# EAGLE board sensor (EAGLE 9.6.2)
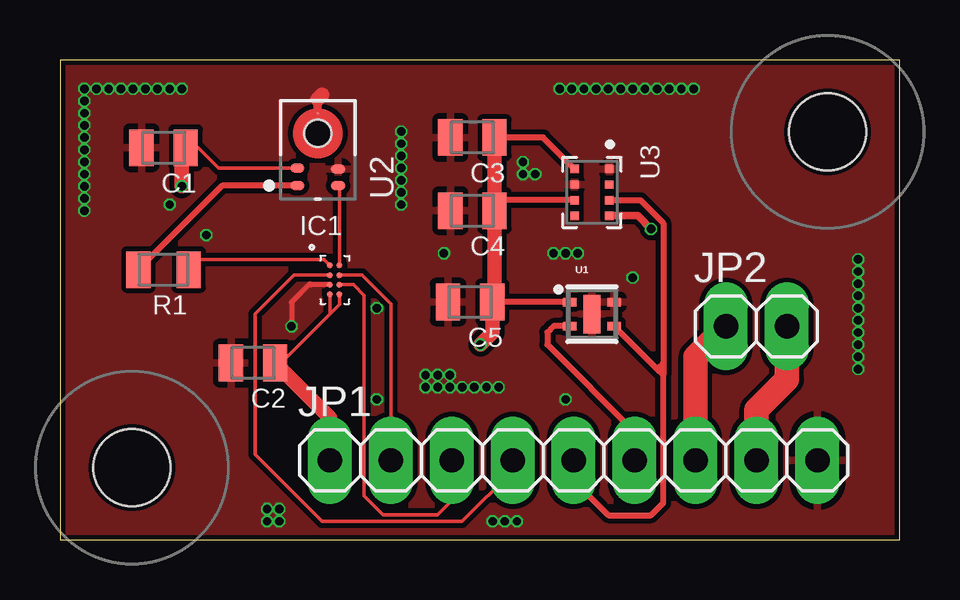
[diagram p0: board, top side]
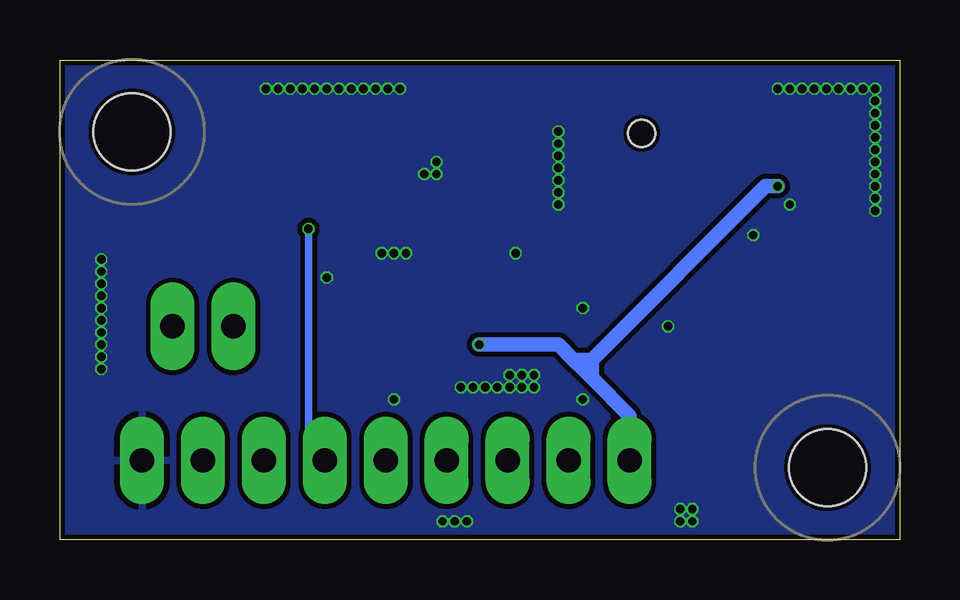
[diagram p1: board, bottom side, seen from below]

Size 35 x 20 mm. Coordinates in mm from the lower left corner, seen from the top.
Outline: 0,0 35,0 35,20 0,20 0,0
Copper layers (1*16): Top 0.035mm / dielectric 1.6mm / Bottom 0.035mm
Design rules "jlcpcb-2layers": minimum track width 5mil, minimum drill 0.3mm, track to track 5mil, track to pad 5mil, pad to pad 5mil, via to via 5mil, smd to smd 0mil, copper to edge 0.2mm, drill to drill 6mil, minimum pad ring 10mil, minimum via ring 3mil, stop-mask expansion 4mil, vias tented up to drill 0.5mm, thermal gap 10mil

## Footprints (pad centres in the part's own frame; a part is rotated, then mirrored left to right if it is on the bottom)
2012-C = smd 1.016 x 1.524: 1 -0.921,0; 2 0.921,0
HOLE_3.2 = hole 3.2: 0,0
WLCSP2X4 = smd 0.26 x 0.26: P$1 0,0; P$2 0.4,0; P$3 0,-0.4; P$4 0.4,-0.4; P$5 0,-0.8; P$6 0.4,-0.8; P$7 0,-1.2; P$8 0.4,-1.2
1X09 = drill 1.016 long: 1 -10.16,0; 2 -7.62,0; 3 -5.08,0; 4 -2.54,0; 5 0,0; 6 2.54,0; 7 5.08,0; 8 7.62,0; 9 10.16,0
1X02 = drill 1.016 long: 1 -1.27,0; 2 1.27,0
2012-R = smd 1.016 x 1.524: 1 -1.048,0; 2 1.048,0
SHTC3 = smd 0.55 x 0.35: 1 -0.925,0.5; 2 -0.925,-0.5; 3 0.925,-0.5; 4 0.925,0.5 | smd 0.7 x 1.6: 5 0,0
IM69D130 = smd 0.4 x 0.6: 1 -1.5,0.85; 2 -0.775,0.85; 3 -1.5,-0.85; 4 -0.8,-0.85 | smd 0.127 x 0.127: 5 1.524,0 | hole 1.118: 0.686,0
XDCR_DPS310 = smd 0.35 x 0.35: 1 -0.975,0.725; 2 -0.325,0.725; 3 0.325,0.725; 4 0.975,0.725; 5 0.975,-0.725; 6 0.325,-0.725; 7 -0.325,-0.725; 8 -0.975,-0.725

## Placement (x,y rotation side)
C1  0.1u  [2012-C]  4.32,16.34 180 top
C2  0.1u  [2012-C]  8.05,7.37 180 top
C3  0.1u  [2012-C]  17.19,16.76 180 top
C4  0.1u  [2012-C]  17.19,13.72 180 top
C5  0.1u  [2012-C]  17.1,9.91 180 top
HOLE1  HOLE_3.2  [HOLE_3.2]  3,3 0 top
HOLE2  HOLE_3.2  [HOLE_3.2]  32,17 0 top
IC1  ADAU7002  [WLCSP2X4]  11.26,11.43 0 top
JP1  [1X09]  21.42,3.3 0 top
JP2  [1X02]  29.04,8.89 0 top
R1  100  [2012-R]  4.32,11.26 180 top
U1  SHTC3  [SHTC3]  22.18,9.4 0 top
U2  IM69D130  [IM69D130]  10.75,16.26 90 top
U3  DPS310  [XDCR_DPS310]  22.18,14.48 270 top

## Library data of the parts
C1-C5 R1 = Passive_Robotech
HOLE1 HOLE2 = Document_Robotech
IC1 = rezzonics
JP1 JP2 = pinhead
U1 = SparkFun-Sensors; PROD_ID: IC-14840
U2 = IC_Robotech
U3 = IC_Robotech; AVAILABILITY: In Stock; DESCRIPTION: Pressure Sensor 4.35PSI ~ 17.4PSI (30kPa ~ 120kPa) Vented Gauge - 24 b 8-VFLGA; MF: Infineon Technologies; MP: DPS310; PACKAGE: VFLGA-8 Infineon Technologies; PRICE: None; PURCHASE-URL: https://pricing.snapeda.com/search/part/DPS310/?ref=eda

## Nets
+3V3: C1.1 C2.1 C3.1 C4.1 C5.1 IC1.P$7 IC1.P$8 JP1.1 U1.1 U2.2 U3.6 U3.8
BCLK: IC1.P$4 JP1.2
GND: C1.2 C2.2 C3.2 C4.2 C5.2 IC1.P$5 JP1.9 U1.4 U1.5 U2.4 U2.5 U3.1 U3.7
LRCLK: IC1.P$6 JP1.3
N$1: R1.2 U2.1
N$2: IC1.P$1 R1.1
N$3: IC1.P$2 U2.3
SCL: JP1.6 U1.2 U3.4
SDA: JP1.5 U1.3 U3.3
SDATA: IC1.P$3 JP1.4
SP_N: JP1.8 JP2.2
SP_P: JP1.7 JP2.1

## Tracks (layer width: path | path; a pad name or v marks a point on that pad's centre or on a via)
+3V3  (via drill 0.35)
  Top 0.152: IC1.P$7 11.26,9.4 | 11.26,9.4 9.22,7.37 C2.1 | IC1.P$8 11.66,9.8 11.26,9.4 | U2.2 6.62,15.48 5.76,16.34 C1.1
  Top 0.254: U1.1 18.03,9.9 C5.1 | U3.6 18.55,14.15 C4.1 | U3.8 20.14,16.76 C3.1
  Top 0.61: C3.1 C4.1 18.11,9.98 18.03,9.9 18.03,8.64 v17.53,8.13 | JP1.1 11.26,5.08 C2.1 | v5.08,14.73 5.08,16.18 C1.1
  Bottom 0.61: JP1.1 11.26,5.16 12.83,6.73 | v17.53,8.13 14.22,8.13 13.59,7.49 | 12.83,6.73 13.21,7.11 | 13.21,7.11 13.59,7.49 | 13.21,7.11 12.83,7.49 | 12.83,7.49 5.59,14.73 v5.08,14.73 | 12.83,6.73 12.83,7.49 | 12.83,7.49 13.59,7.49
BCLK
  Top 0.152: IC1.P$4 12.59,11.03 13.8,9.83 JP1.2
GND  (via drill 0.35)
  Top 0.203: IC1.P$5 10.45,10.63 10.41,10.67 9.65,9.91 v9.65,8.89
  Top 0.356: U2.5 10.75,18.37
  Top 0.61: 10.75,18.37 10.92,18.54
  other vias: 13.21,9.65 13.21,5.84 1.02,18.8 1.02,18.29 1.02,17.78 1.02,17.27 1.02,16.76 1.02,16.26 1.02,15.75 1.02,15.24 1.02,14.73 1.02,14.22 1.02,13.72 1.52,18.8 2.03,18.8 2.54,18.8 3.05,18.8 3.56,18.8 4.06,18.8 4.57,18.8 5.08,18.8 19.3,15.75 19.3,15.24 19.81,15.24 20.83,18.8 21.34,18.8 21.84,18.8 22.35,18.8 22.86,18.8 23.37,18.8 23.88,18.8 24.38,18.8 24.89,18.8 25.4,18.8 25.91,18.8 26.42,18.8 15.24,6.35 15.75,6.35 16.26,6.35 16.76,6.35 17.27,6.35 17.78,6.35 18.29,6.35 15.24,6.86 15.75,6.86 16.26,6.86 14.22,17.02 14.22,16.51 14.22,16 14.22,15.49 14.22,14.99 14.22,14.48 14.22,13.97 20.57,11.94 21.08,11.94 21.59,11.94 23.88,10.92 33.27,11.68 33.27,11.18 33.27,10.67 33.27,10.16 33.27,9.65 33.27,9.14 33.27,8.64 33.27,8.13 33.27,7.62 33.27,7.11 16,11.94 18.03,0.76 18.54,0.76 19.05,0.76 21.08,5.84 8.64,0.76 9.14,0.76 8.64,1.27 9.14,1.27 6.1,12.7 4.57,13.97
  pour Bottom (isolate 0.203): 0,20 0,0 35,0 35,20
  pour Top (isolate 0.203): 0,20 0,0 35,0 35,20
LRCLK
  Top 0.152: IC1.P$6 12.23,10.63 12.68,10.18 12.68,1.82 13.46,1.04 15.75,1.04 16.34,1.63 JP1.3
N$1
  Top 0.254: U2.1 6.77,14.76 R1.2
N$2
  Top 0.152: R1.1 5.79,11.68 11,11.68 IC1.P$1
N$3
  Top 0.152: U2.3 11.66,14.7 IC1.P$2
SCL  (via drill 0.35)
  Top 0.254: U1.2 20.58,8.9 20.32,8.64 20.32,8.13 23.96,4.49 JP1.6
  Top 0.305: U3.4 24.09,13.5 v24.64,12.95
  Bottom 0.305: v24.64,12.95 24.64,3.98 JP1.6
SDA
  Top 0.254: JP1.5 21.42,2.46 22.86,1.02 24.64,1.02 25.15,1.52 25.15,6.86 | 25.15,6.86 24.89,7.11 | 24.89,7.11 U1.3 | U3.3 24.2,14.15 25.15,13.21 25.15,7.37 | 25.15,7.37 25.15,6.86 | 25.15,7.37 24.89,7.11
SDATA
  Top 0.152: IC1.P$3 9.76,11.03 8.13,9.4 8.13,3.56 10.92,0.76 16.76,0.76 18.88,2.87 JP1.4
SP_N
  Top 1.016: JP1.8 29.04,5.41 30.31,6.68 JP2.2
SP_P
  Top 1.016: JP1.7 26.5,7.62 JP2.1